# EAGLE board rtc_ds1307_breakout (EAGLE 6.3)
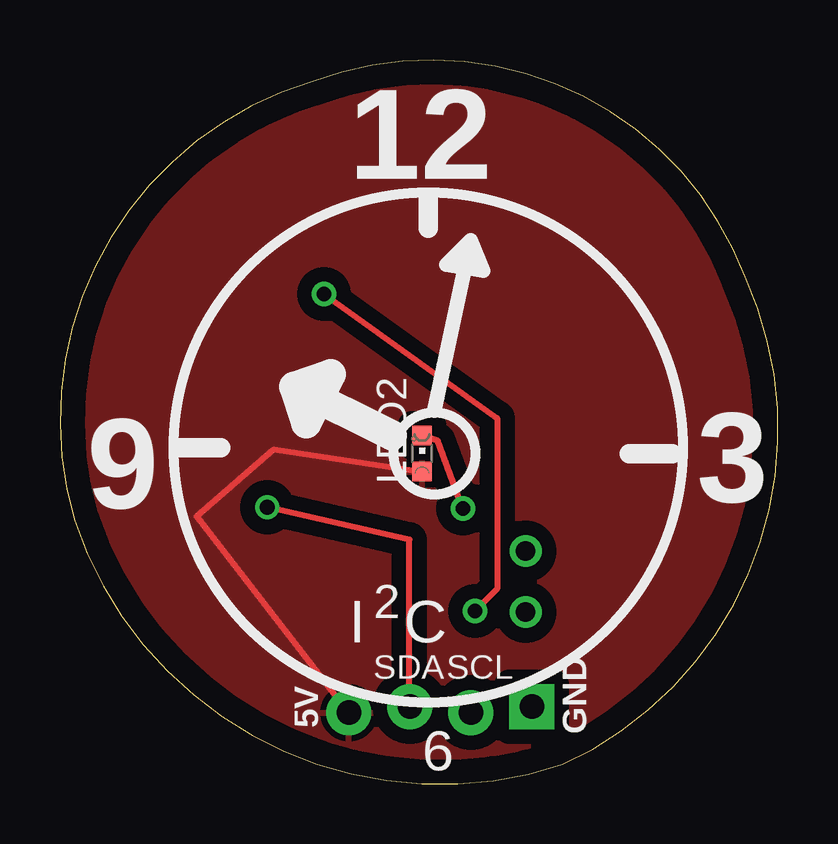
[diagram p0: board, top side]
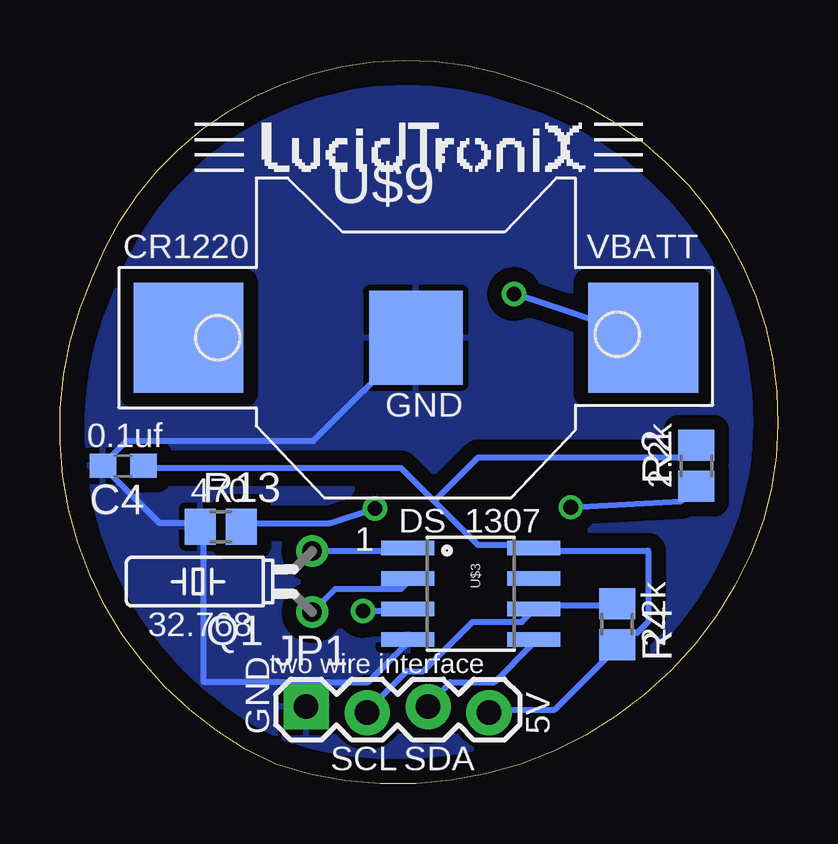
[diagram p1: board, bottom side, seen from below]

Size 29.91 x 30.16 mm. Coordinates in mm from the lower left corner, seen from the top.
Outline: 0.61,10.97 arc90 20.93,0.81 arc90 28.55,21.13 arc90 10.51,29.26 arc90 0.61,10.97
Copper layers (1*16): Top 0.035mm / dielectric 1.5mm / Bottom 0.035mm
Design rules "default *": minimum track width 10mil, minimum drill 24mil, track to track 8mil, track to pad 8mil, pad to pad 8mil, via to via 8mil, smd to smd 8mil, copper to edge 40mil, drill to drill 8mil, minimum pad ring 10mil, minimum via ring 8mil, stop-mask expansion 4mil, vias tented up to drill 26mil, thermal gap 10mil

## Footprints (pad centres in the part's own frame; a part is rotated, then mirrored left to right if it is on the bottom)
C0603 = smd 1.1 x 1: 1 -0.85,0; 2 0.85,0
1X04_LOCK = drill 1.016 pad 1.88 square: 1 0,0.127 | drill 1.016 pad 1.88: 2 2.54,-0.127; 3 5.08,0.127; 4 7.62,-0.127
CHIPLED_0603 = smd 0.8 x 0.8: A 0,-0.75; C 0,0.75
TC26H = drill 0.813: 1 -1.27,0; 2 1.27,0
R0805 = smd 1.3 x 1.5: 1 -0.85,0; 2 0.85,0
SO08 = smd 0.61 x 2.21: 1 -1.905,-2.616; 2 -0.635,-2.616; 3 0.635,-2.616; 4 1.905,-2.616; 5 1.905,2.616; 6 0.635,2.616; 7 -0.635,2.616; 8 -1.905,2.616
CR1220-SMD = smd 4.572 x 4.572: +$1 -9.47,0; +$2 9.47,0 | smd 3.9 x 3.9: - 0,0

## Placement (x,y rotation side)
C4  0.1uf  [C0603]  27.28,13.25 180 bottom
JP1  [1X04_LOCK]  19.66,3.09 0 bottom
LED2  [CHIPLED_0603]  15.09,13.76 0 top
Q1  32.768  [TC26H]  19.4,8.43 90 bottom
R2  2.2k  [R0805]  3.4,13.25 90 bottom
R4  2.2k  [R0805]  6.7,6.65 270 bottom
R13  300  [R0805]  23.21,10.71 0 bottom
U$1  [LUCIDTRONIX_LOGO_.75_INCH]  24.23,25.19 0 bottom
U$3  DS1307SO8  [SO08]  12.8,7.92 270 bottom
U$9  [CR1220-SMD]  15.09,18.59 0 bottom

## Library data of the parts
C4 R2 R4 R13 = resistor
JP1 U$3 = sparkfun
LED2 = led
Q1 = crystal; OC_FARNELL: unknown; OC_NEWARK: unknown
U$1 = Lucidtronix_silk
U$9 = adafruit

## Nets
+5V: C4.1 JP1.4 LED2.A R2.2 R4.2 U$3.8
GND: C4.2 JP1.1 R13.1 U$3.4 U$9.-
N$3: Q1.1 U$3.2
N$5: U$3.3 U$9.+$2
N$7: Q1.2 U$3.1
N$14: LED2.C R13.2
SCL: JP1.2 R4.1 U$3.6
SDA: JP1.3 R2.1 U$3.5

## Tracks (layer width: path | path; a pad name or v marks a point on that pad's centre or on a via)
+5V
  Top 0.254: JP1.4 5.69,11.15 8.91,13.94 LED2.A
  Bottom 0.254: JP1.4 12.04,3.09 9.3,3.09 6.78,5.61 R4.2 6.55,5.84 6.09,6.29 5.87,6.29 5.41,6.75 5.41,9.72 9.98,9.72 U$3.8 10.21,9.95 12.5,9.95 14.32,11.78 | 14.32,11.78 15.7,13.15 26.21,13.15 C4.1 | 14.32,11.78 12.5,13.61 4.04,13.61 3.58,14.07 R2.2
  pour Top (isolate 0.61): -1.68,32.56 -1.68,-1.48 35.91,-1.48 35.91,32.56
GND
  Bottom 0.254: 18.67,4.24 17.07,4.24 15.47,5.84 U$3.4 | 18.67,4.24 19.58,3.32 JP1.1 | 18.67,4.24 23.93,4.24 23.93,10.64 R13.1 24.15,10.87 25.75,10.87 28.04,13.15 C4.2 28.04,13.38 27.13,14.3 19.35,14.3 15.24,18.41 U$9.-
  pour Bottom (isolate 0.61): -2.44,33.32 -2.44,-1.99 36.93,-1.99 36.93,33.32
N$3
  Bottom 0.254: Q1.1 18.44,8.12 15.7,8.12 15.47,8.35 U$3.2
N$5  (via drill 0.61)
  Top 0.254: v17.3,7.21 18.21,8.12 18.21,15.24 v11,20.42
  Bottom 0.254: v17.3,7.21 15.47,7.21 U$3.3 | v11,20.42 5.64,18.64 U$9.+$2
N$7
  Bottom 0.254: U$3.1 15.47,9.72 19.35,9.72 Q1.2
N$14  (via drill 0.61)
  Top 0.254: v16.79,11.48 15.75,14.3 LED2.C
  Bottom 0.254: v16.79,11.48 18.67,10.87 22.33,10.87 R13.2
SCL
  Bottom 0.254: R4.1 6.78,7.44 9.98,7.44 U$3.6 10.21,7.21 10.67,6.75 12.72,6.75 14.78,4.69 15.47,4.69 17.07,3.09 JP1.2
SDA  (via drill 0.61)
  Top 0.254: v8.63,11.53 14.55,10.18 14.55,3.32 JP1.3
  Bottom 0.254: v8.63,11.53 4.04,11.78 3.58,12.24 R2.1 | U$3.5 10.21,5.84 11.81,4.24 13.64,4.24 14.55,3.32 JP1.3

## Text on the board
tPlace: 12 | 9 | 3 | 2 | I | C | SDA | SCL | 5V | GND | 6
bPlace: VBATT | CR1220 | 2.2k | GND | 0.1uf | DS | 470 | 1307 | 1 | 2.2k | 32.768 | two wire interface | 5V | GND | SDA | SCL